# Altium PCB m2_emmc.PcbDoc
Units mil, origin at the board's own origin, x right, y up, seen from the top; angles counter-clockwise.
Board outline 866.14 x 1181.1 mil, 4 copper layers (Top Layer, IN1, IN2, Bottom Layer), stack 31.156 mil thick; 31 components, 15 nets, 275 pads, 49 vias.
Unrouted connection lines stored in the file: 25.
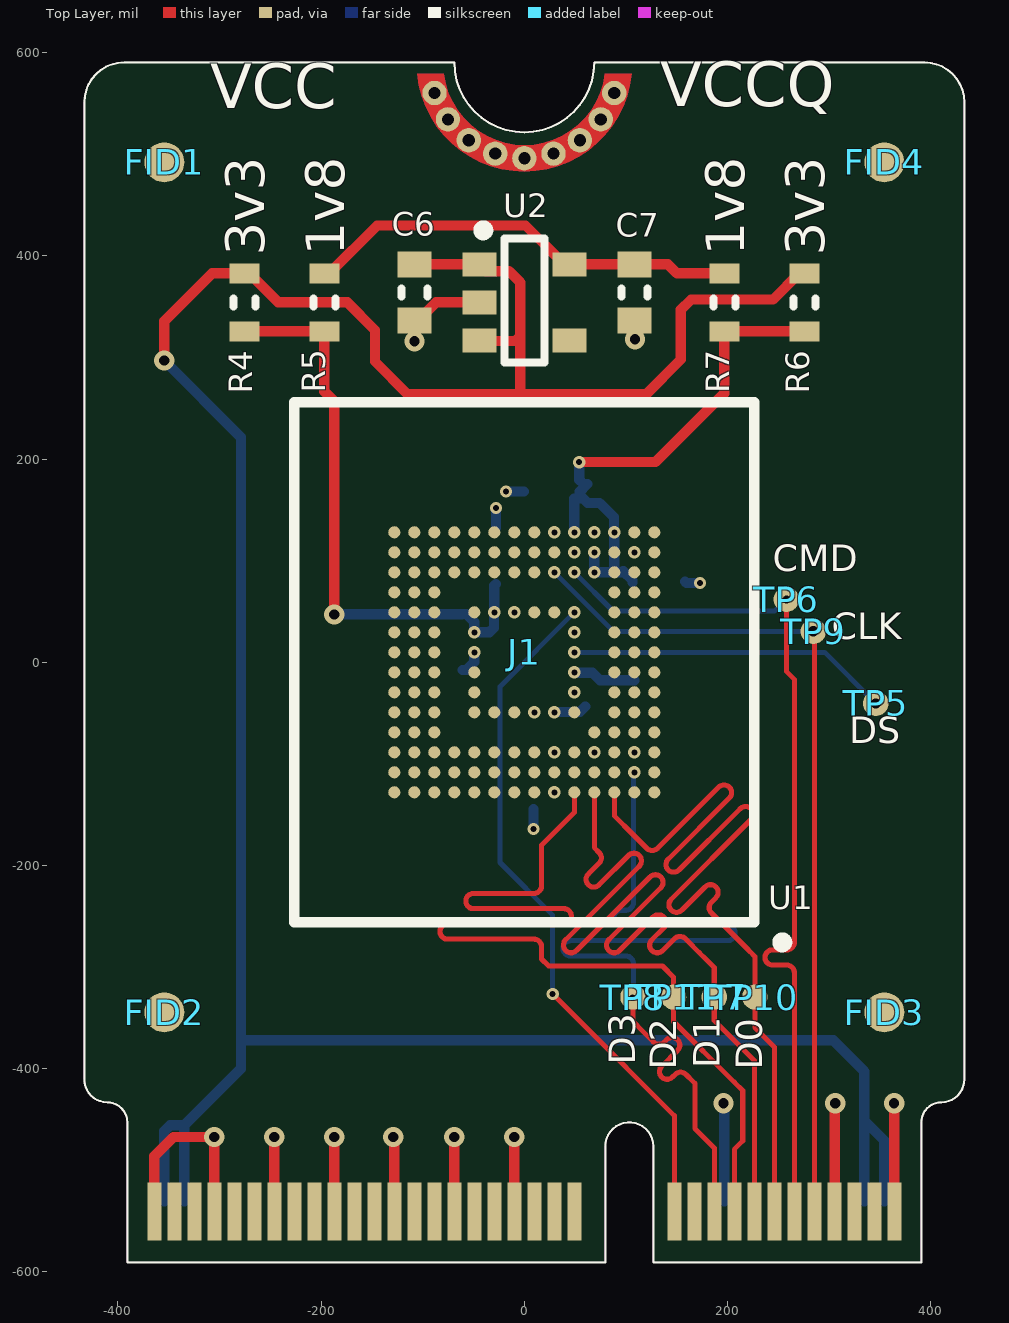
[diagram p0: Top Layer view]
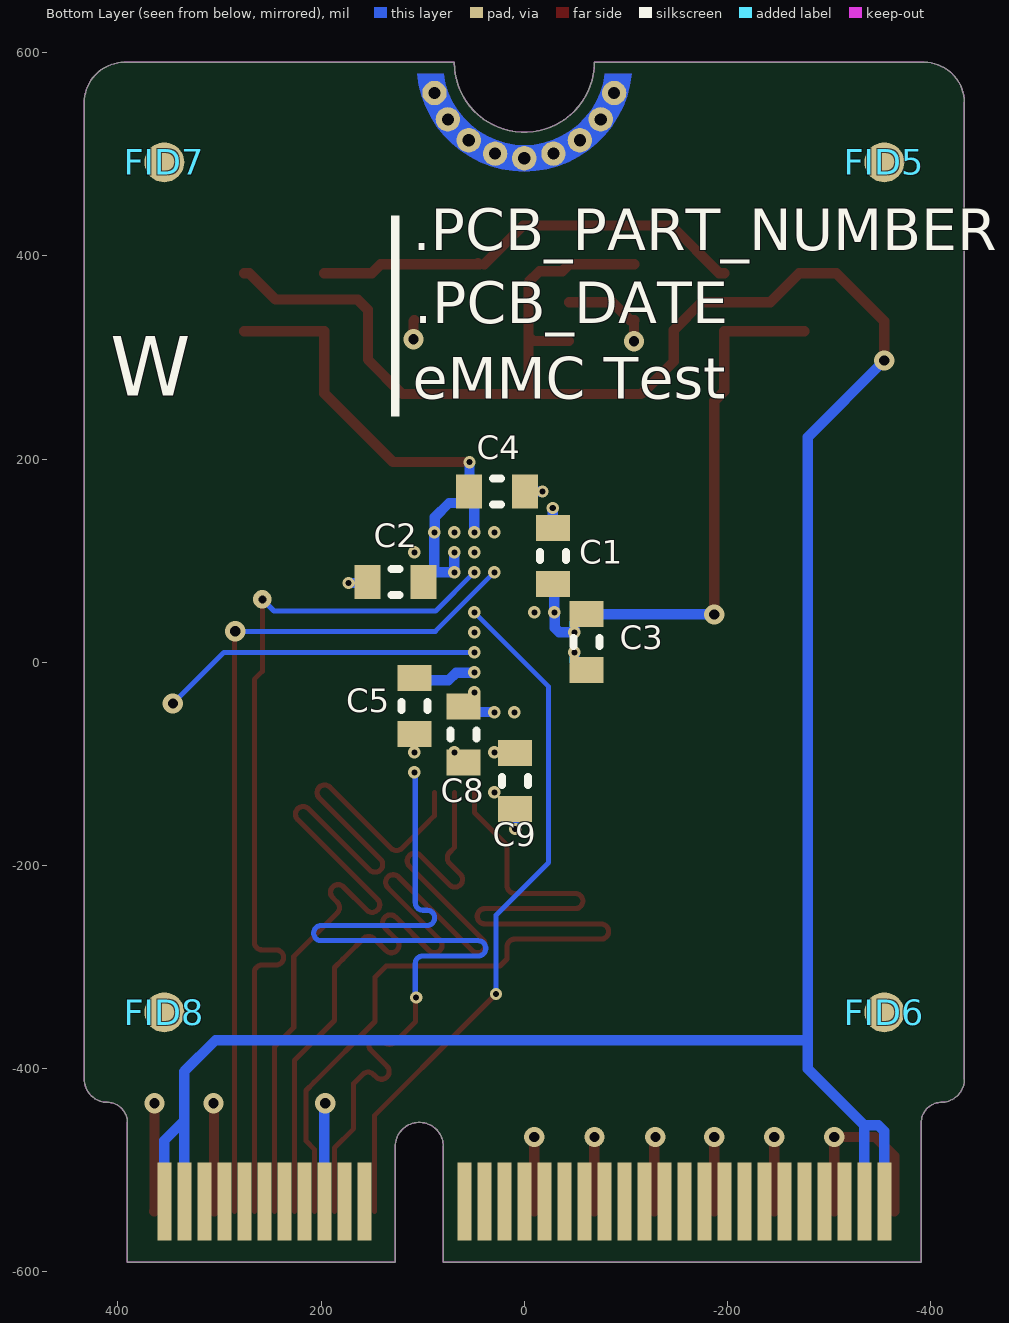
[diagram p1: Bottom Layer view, seen from below]
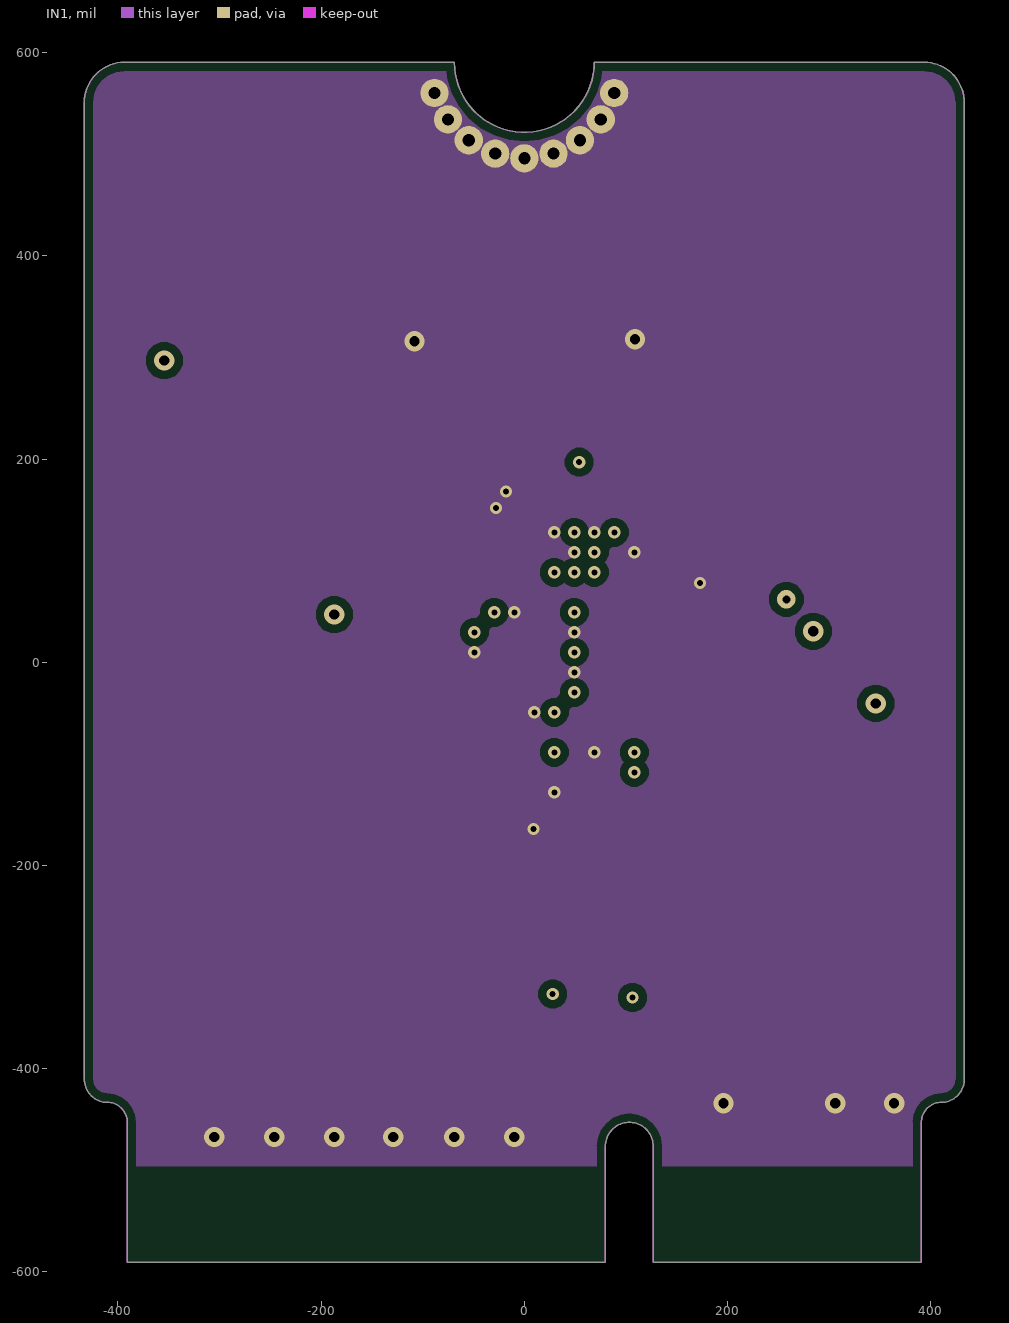
[diagram p2: IN1]
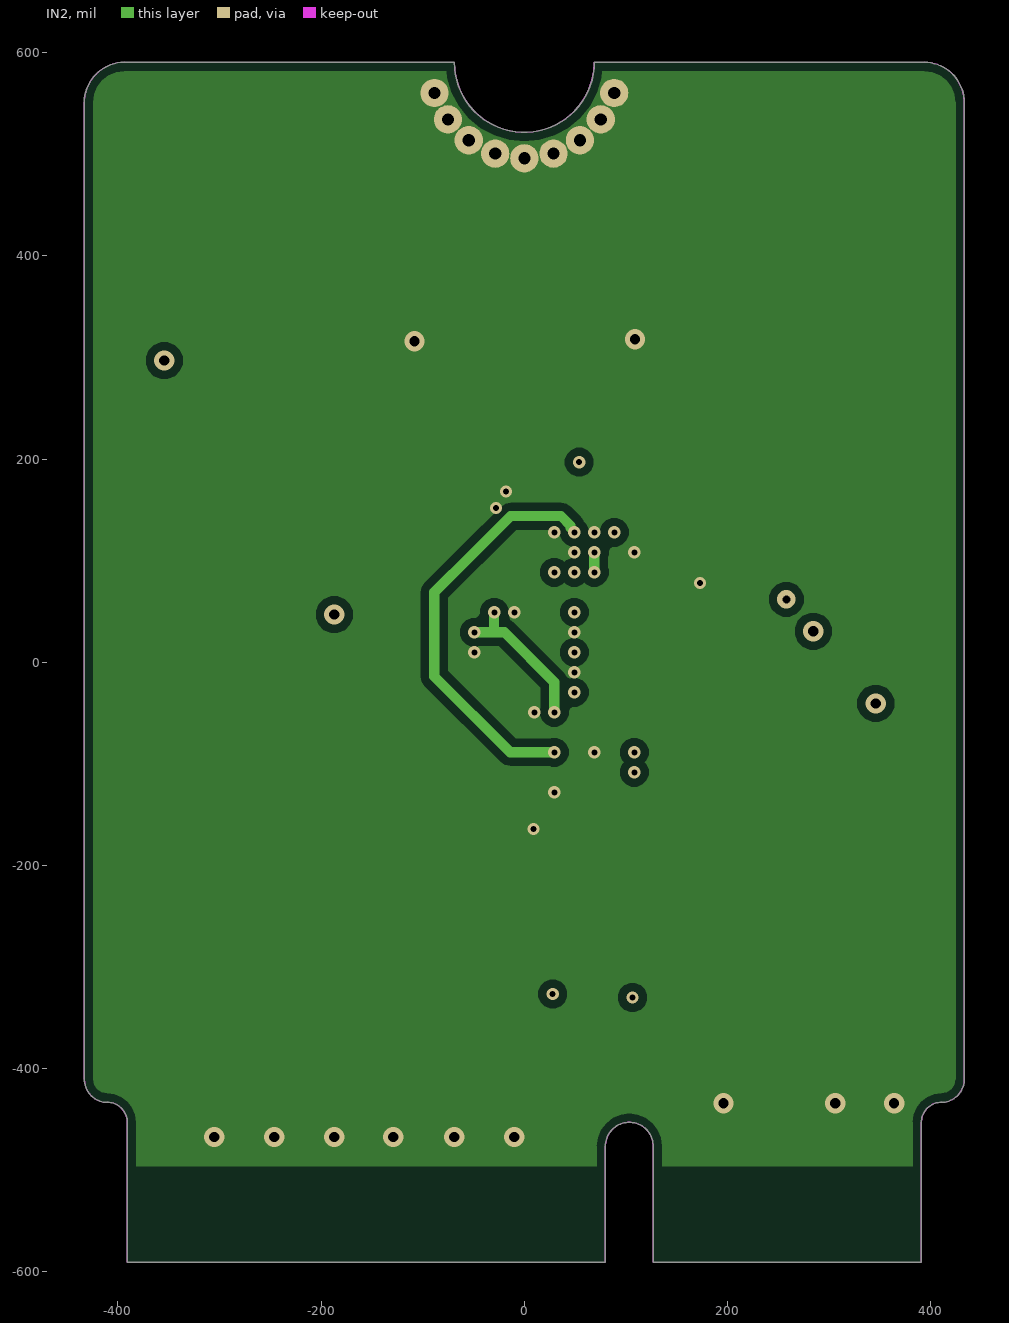
[diagram p3: IN2]
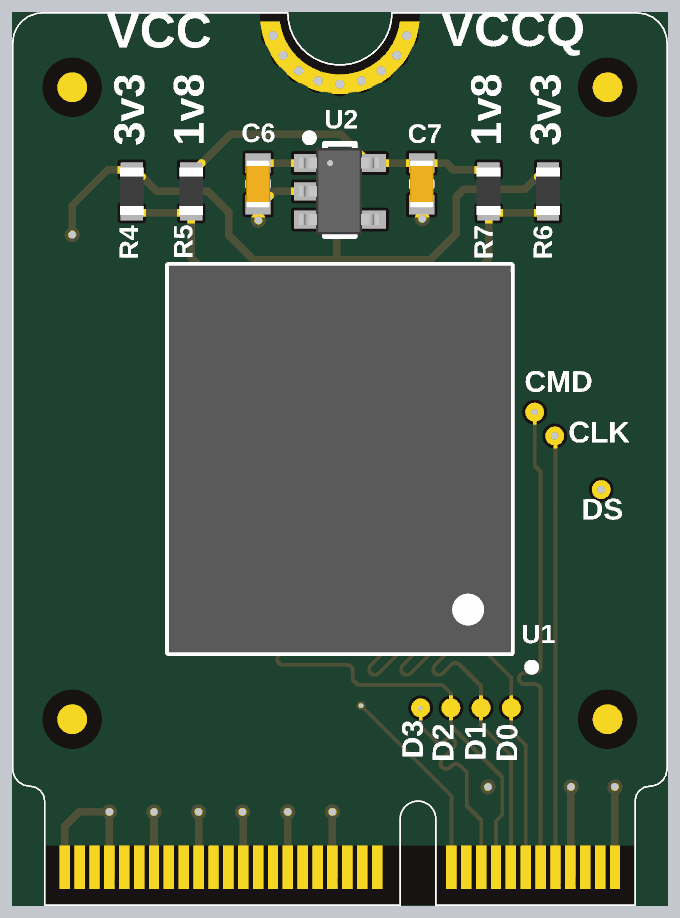
[diagram p4: 3D render of the assembled board from above, using the file's embedded part models]
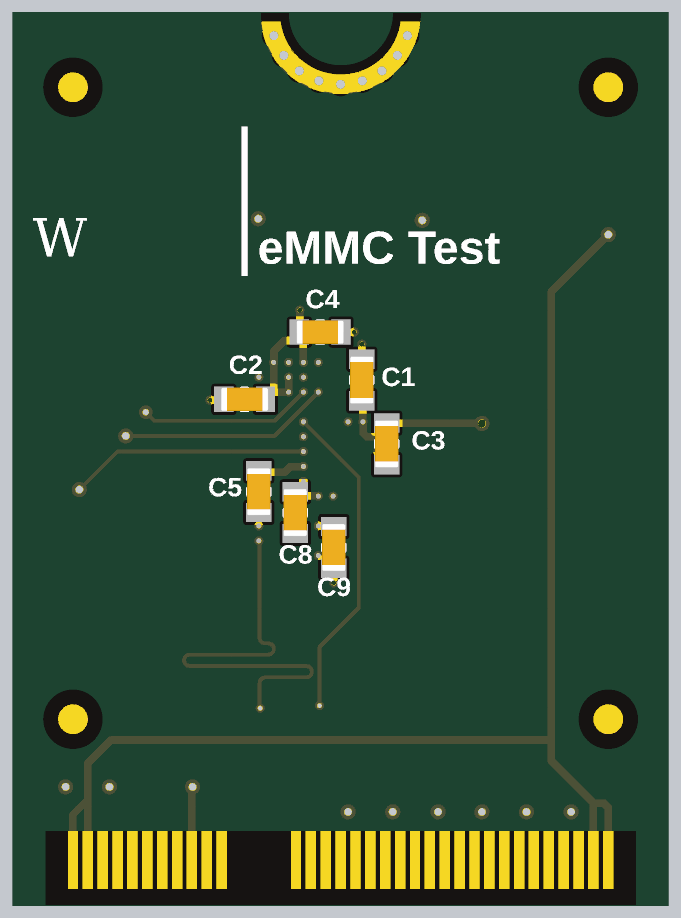
[diagram p5: 3D render of the assembled board from below, using the file's embedded part models]

## Layer stack, top to bottom
Top Solder: solder mask 0.4, Solder Resist, Dk 3.5
Top Layer: signal copper 1.4
Dielectric 1: prepreg 2.8, PP-006, Dk 4.1
IN1: signal copper 1.378
Dielectric1: dielectric 20, FR-4, Dk 4.8
IN2: signal copper 1.378
Dielectric 2: prepreg 2.8, PP-006, Dk 4.1
Bottom Layer: signal copper 1.4
Bottom Solder: solder mask 0.4, Solder Resist, Dk 3.5

## Board outline
-433.07,-410.43 ccw(c-410.43,-410.43) -410.43,-433.07 cw(c-410.43,-452.75) -390.75,-452.75 -390.75,-590.55 79.72,-590.55 79.72,-476.38 cw(c103.35,-476.38) 126.97,-476.38 126.97,-590.55 390.75,-590.55 390.75,-452.75 cw(c410.43,-452.75) 410.43,-433.07 ccw(c410.43,-410.43) 433.07,-410.43 433.07,551.18 ccw(c393.7,551.18) 393.7,590.55 68.9,590.55 cw(c0,590.55) -68.9,590.55 -393.7,590.55 ccw(c-393.7,551.18) -433.07,551.18

## Design rules (kind name [scope] priority, off if disabled: settings)
Clearance [All] p1: gap=5 ignorepadtopadclearanceinfootprint=FALSE except(8: Arc-Poly Track-Poly SMDPad-Poly THPad-Poly Via-Poly Fill-Poly Poly-Poly)
ComponentClearance ComponentClearance_1 [InComponent('J1')] p1: gap=0 collisioncheckmode=3 verticalgap=0 showdistances=FALSE donotcheckwithout3dbody=TRUE
ComponentClearance [All] p2: gap=5 collisioncheckmode=3 verticalgap=5 showdistances=FALSE donotcheckwithout3dbody=TRUE
MatchedLengths [InNetClass('EMMC')] p1: tolerance=50 checknetsindiffpair=FALSE checkdiffpairvsdiffpair=TRUE checkxsignals=TRUE checkothers=TRUE
PolygonConnect [All] p1: connectstyle=Direct reliefconductorwidth=10 reliefentries=4 polygonreliefangle="90 Angle" airgapwidth=10
RoutingVias [All] p1: holewidth=10 width=20 viastyle="Through Hole" minholewidth=6 minwidth=12 maxholewidth=50 maxwidth=75
SilkToSolderMaskClearance SilkscreenOverComponentPads [IsPad] p1: minsilkscreentomaskgap=10 clearancetoexposedcopper=TRUE
SolderMaskExpansion [All] p1: expansion=4 istentingtop=FALSE
Width [All] p1: maxlimit=200 minlimit=5 preferedwidth=5
28 further rules are at their usual default settings.

## Classes and differential pairs
net class EMMC: CLK CMD D0 D1 D2 D3

## Components (designator, comment, footprint, x,y, rotation, side; value= is the part's Value field where it differs from the comment)
C1 "0.1µF" C0603_0.90MM_HD -61,20 r90 bottom
C2 "0.1µF" C0603_0.90MM_HD 127,79 r180 bottom
C3 "2.2µF" C0603_0.90MM_HD -28,104.56 r270 bottom
C4 "2.2µF" C0603_0.90MM_HD 27,168 r0 bottom
C5 "1µF" C0603_0.90MM_HD 108.27,-43.21 r270 bottom
C6 "1µF" C0603_0.90MM_HD -108.27,364.17 r90 top
C7 "1µF" C0603_0.90MM_HD 108.27,364.17 r90 top
C8 "0.1µF" C0603_0.90MM_HD 60,-71 r90 bottom
C9 "0.1µF" C0603_0.90MM_HD 9,-117 r90 bottom
FID1 "fiducial-1mm-2mm" fiducial-1mm-2mm -354.33,492.13 r0 top
FID2 "fiducial-1mm-2mm" fiducial-1mm-2mm -354.33,-344.49 r0 top
FID3 "fiducial-1mm-2mm" fiducial-1mm-2mm 354.33,-344.49 r0 top
FID4 "fiducial-1mm-2mm" fiducial-1mm-2mm 354.33,492.13 r0 top
FID5 "fiducial-1mm-2mm" fiducial-1mm-2mm -354.33,492.13 r180 bottom
FID6 "fiducial-1mm-2mm" fiducial-1mm-2mm -354.33,-344.49 r180 bottom
FID7 "fiducial-1mm-2mm" fiducial-1mm-2mm 354.33,492.13 r180 bottom
FID8 "fiducial-1mm-2mm" fiducial-1mm-2mm 354.33,-344.49 r180 bottom
J1 "M2-2230-E CARD" M2-2230-E 0,-590.55 r0 top locked
R4 "0Ω" R0603_0.55MM_HD -275.59,354.33 r270 top
R5 "0Ω" R0603_0.55MM_HD -196.85,354.33 r270 top
R6 "0Ω" R0603_0.55MM_HD 275.59,354.33 r270 top
R7 "0Ω" R0603_0.55MM_HD 196.85,354.33 r270 top
TP5 "SMT Testpoint 20mil" SMT_TP-25 345.93,-40.45 r0 top
TP6 "SMT Testpoint 20mil" SMT_TP-25 257.87,62.01 r0 top
TP7 "SMT Testpoint 20mil" SMT_TP-25 186.93,-329.45 r0 top
TP8 "SMT Testpoint 20mil" SMT_TP-25 106.93,-329.45 r0 top
TP9 "SMT Testpoint 20mil" SMT_TP-25 284.45,30.51 r0 top
TP10 "SMT Testpoint 20mil" SMT_TP-25 226.93,-329.45 r90 top
TP11 "SMT Testpoint 20mil" SMT_TP-25 146.93,-329.45 r90 top
U1 "THGBMUG6C1LBAIL" BGA153C50P14X14_1150X1300X80 0,0 r180 top locked
U2 "NCP161ASN180T1G" SOT23-5 0,354.33 r0 top

## Footprints (in the part's own frame and the unit in brackets; to place one, negate y for a bottom-side part, rotate by r counter-clockwise, add the part's x,y. Pads: shape width x height; smd on the part's side, far side on the other; paste and mask are expansions set on the pad)
BGA153C50P14X14_1150X1300X80 [mil] "BGA, 153-Leads, Body 11.50x13.00mmx0.80mm, Pitch 0.50mm"
  round 12 smd mask+0: A1(-127.95,127.95) A2(-108.27,127.95) A3(-88.58,127.95) A4(-68.9,127.95) A5(-49.21,127.95) A6(-29.53,127.95) A7(-9.84,127.95) A8(9.84,127.95) A9(29.53,127.95) A10(49.21,127.95) A11(68.9,127.95) A12(88.58,127.95) A13(108.27,127.95) A14(127.95,127.95) B1(-127.95,108.27) B2(-108.27,108.27) B3(-88.58,108.27) B4(-68.9,108.27) B5(-49.21,108.27) B6(-29.53,108.27) B7(-9.84,108.27) B8(9.84,108.27) B9(29.53,108.27) B10(49.21,108.27) B11(68.9,108.27) B12(88.58,108.27) B13(108.27,108.27) B14(127.95,108.27) C1(-127.95,88.58) C2(-108.27,88.58) C3(-88.58,88.58) C4(-68.9,88.58) C5(-49.21,88.58) C6(-29.53,88.58) C7(-9.84,88.58) C8(9.84,88.58) C9(29.53,88.58) C10(49.21,88.58) C11(68.9,88.58) C12(88.58,88.58) C13(108.27,88.58) C14(127.95,88.58) D1(-127.95,68.9) D2(-108.27,68.9) D3(-88.58,68.9) D4(-68.9,68.9) D12(88.58,68.9) D13(108.27,68.9) D14(127.95,68.9) E1(-127.95,49.21) E2(-108.27,49.21) E3(-88.58,49.21) E5(-49.21,49.21) E6(-29.53,49.21) E7(-9.84,49.21) E8(9.84,49.21) E9(29.53,49.21) E10(49.21,49.21) E12(88.58,49.21) E13(108.27,49.21) E14(127.95,49.21) F1(-127.95,29.53) F2(-108.27,29.53) F3(-88.58,29.53) F5(-49.21,29.53) F10(49.21,29.53) F12(88.58,29.53) F13(108.27,29.53) F14(127.95,29.53) G1(-127.95,9.84) G2(-108.27,9.84) G3(-88.58,9.84) G5(-49.21,9.84) G10(49.21,9.84) G12(88.58,9.84) G13(108.27,9.84) G14(127.95,9.84) H1(-127.95,-9.84) H2(-108.27,-9.84) H3(-88.58,-9.84) H5(-49.21,-9.84) H10(49.21,-9.84) H12(88.58,-9.84) H13(108.27,-9.84) H14(127.95,-9.84) J1(-127.95,-29.53) J2(-108.27,-29.53) J3(-88.58,-29.53) J5(-49.21,-29.53) J10(49.21,-29.53) J12(88.58,-29.53) J13(108.27,-29.53) J14(127.95,-29.53) K1(-127.95,-49.21) K2(-108.27,-49.21) K3(-88.58,-49.21) K5(-49.21,-49.21) K6(-29.53,-49.21) K7(-9.84,-49.21) K8(9.84,-49.21) K9(29.53,-49.21) K10(49.21,-49.21) K12(88.58,-49.21) K13(108.27,-49.21) K14(127.95,-49.21) L1(-127.95,-68.9) L2(-108.27,-68.9) L3(-88.58,-68.9) L12(88.58,-68.9) L13(108.27,-68.9) L14(127.95,-68.9) M1(-127.95,-88.58) M2(-108.27,-88.58) M3(-88.58,-88.58) M4(-68.9,-88.58) M5(-49.21,-88.58) M6(-29.53,-88.58) M7(-9.84,-88.58) M8(9.84,-88.58) M9(29.53,-88.58) M10(49.21,-88.58) M11(68.9,-88.58) M12(88.58,-88.58) M13(108.27,-88.58) M14(127.95,-88.58) N1(-127.95,-108.27) N2(-108.27,-108.27) N3(-88.58,-108.27) N4(-68.9,-108.27) N5(-49.21,-108.27) N6(-29.53,-108.27) N7(-9.84,-108.27) N8(9.84,-108.27) N9(29.53,-108.27) N10(49.21,-108.27) N11(68.9,-108.27) N12(88.58,-108.27) N13(108.27,-108.27) N14(127.95,-108.27) P1(-127.95,-127.95) P2(-108.27,-127.95) P3(-88.58,-127.95) P4(-68.9,-127.95) P5(-49.21,-127.95) P6(-29.53,-127.95) P7(-9.84,-127.95) P8(9.84,-127.95) P9(29.53,-127.95) P10(49.21,-127.95) P11(68.9,-127.95) P12(88.58,-127.95) P13(108.27,-127.95) P14(127.95,-127.95)
  silkscreen extent -259,-256 226,281, body extent -226,-256 226,256, height 31
C0603_0.90MM_HD [mm] "Chip Capacitor, 2-Leads, Body 1.60x0.80mm, IPC High Density"
  rect 0.65x0.85 smd: 1(-0.7,0) 2(0.7,0)
  silkscreen extent -0.1,-0.33 0.1,0.33, body extent -0.8,-0.4 0.8,0.4, height 0.9
fiducial-1mm-2mm [mm] "1mm Pad 2mm Opening"
  round 1 smd paste-2539.97 mask+0.5: 1(0,0)
M2-2230-E [mm]
  rect 0.35x1.45 smd paste-2539.97 mask+0: 1(9.25,1.275) 3(8.75,1.275) 5(8.25,1.275) 7(7.75,1.275) 9(7.25,1.275) 11(6.75,1.275) 13(6.25,1.275) 15(5.75,1.275) 17(5.25,1.275) 19(4.75,1.275) 21(4.25,1.275) 23(3.75,1.275) 33(1.25,1.275) 35(0.75,1.275) 37(0.25,1.275) 39(-0.25,1.275) 41(-0.75,1.275) 43(-1.25,1.275) 45(-1.75,1.275) 47(-2.25,1.275) 49(-2.75,1.275) 51(-3.25,1.275) 53(-3.75,1.275) 55(-4.25,1.275) 57(-4.75,1.275) 59(-5.25,1.275) 61(-5.75,1.275) 63(-6.25,1.275) 65(-6.75,1.275) 67(-7.25,1.275) 69(-7.75,1.275) 71(-8.25,1.275) 73(-8.75,1.275) 75(-9.25,1.275)
  rect 0.35x1.95 smd far side paste-2539.97 mask+0: 2(9,1.525) 4(8.5,1.525) 6(8,1.525) 8(7.5,1.525) 10(7,1.525) 12(6.5,1.525) 14(6,1.525) 16(5.5,1.525) 18(5,1.525) 20(4.5,1.525) 22(4,1.525) 32(1.5,1.525) 34(1,1.525) 36(0.5,1.525) 38(0,1.525) 40(-0.5,1.525) 42(-1,1.525) 44(-1.5,1.525) 46(-2,1.525) 48(-2.5,1.525) 50(-3,1.525) 52(-3.5,1.525) 54(-4,1.525) 56(-4.5,1.525) 58(-5,1.525) 60(-5.5,1.525) 62(-6,1.525) 64(-6.5,1.525) 66(-7,1.525) 68(-7.5,1.525) 70(-8,1.525) 72(-8.5,1.525) 74(-9,1.525)
  round 0.61 / inner round 0.708 / far side round 0.61 hole 0.305: SCREW(-2.245,29.233) SCREW(-1.909,28.573) SCREW(-1.389,28.051) SCREW(-0.728,27.717) SCREW(0.001,27.6) SCREW(0.73,27.717) SCREW(1.39,28.051) SCREW(1.911,28.573) SCREW(2.246,29.233)
  Top Layer region: -2.68,29.708 -2.242,28.472 -1.271,27.589 0.001,27.27 1.273,27.589 2.243,28.472 2.681,29.708 2.681,29.708 2.017,29.708 1.67,28.803 0.942,28.162 0.001,27.93 -0.941,28.162 -1.668,28.803 -2.015,29.708 -2.015,29.708
  Bottom Layer region: -2.68,29.708 -2.242,28.472 -1.271,27.589 0.001,27.27 1.273,27.589 2.243,28.472 2.681,29.708 2.681,29.708 2.017,29.708 1.67,28.803 0.942,28.162 0.001,27.93 -0.941,28.162 -1.668,28.803 -2.015,29.708 -2.015,29.708
  silkscreen extent -11,0 11,30
R0603_0.55MM_HD [mm] "Resistor 0603 High Density"
  rect 0.5x0.75 smd: 1(-0.725,0) 2(0.725,0)
  silkscreen extent -0.1,-0.28 0.1,0.28, body extent -0.8,-0.4 0.8,0.4, height 0.55
SMT_TP-25 [mil] ".025\" SMT Test pad"
  round 25 smd paste-25: 1(0,0)
SOT23-5 [mm] "SOT23, 5-Leads, Body 3.1x2.6mm (max), Pitch 0.95mm, IPC High Density"
  rect 0.85x0.6 smd: 1(-1.125,0.95) 2(-1.125,0) 3(-1.125,-0.95) 4(1.125,-0.95) 5(1.125,0.95)
  silkscreen extent -1.15,-1.5 0.5,1.92, body extent -1.38,-1.45 1.32,1.45, height 1.15

## Part data
C1 C2 C8 C9: library part GCJ188R71C104KA01D, "CAP CER 0.1UF 16V X7R 0603", Internal Part Number=nan, Manufacturer="Murata Electronics", Operating Temperature="-55°C ~ 125°C", Package=603, Ratings=AEC-Q200, Temperature Coefficient=X7R, Tolerance=±10%, Voltage - Rated=16V, Category=Capacitors, Flags=nan, JLCPCB Part #=nan, kicad-footprint=C0603_0.90MM_MD:C0603_0.90MM_MD, kicad-symbol=Capacitor:C_2P_NP, Manufacturer Part Number=GCJ188R71C104KA01D, Substitution Notes="0.1µF , 16V , ±10% , X7R , -55°C ~ 125°C , AEC-Q200 , 0603", Thickness (Max)=0.90MM
C3 C4: library part GCM188R70J225KE22D, "CAP CER 2.2UF 6.3V X7R 0603", Internal Part Number=nan, Manufacturer="Murata Electronics", Operating Temperature="-55°C ~ 125°C", Package=603, Ratings=AEC-Q200, Temperature Coefficient=X7R, Tolerance=±10%, Voltage - Rated=6.3V, Category=Capacitors, Flags=nan, JLCPCB Part #=nan, kicad-footprint=C0603_0.90MM_MD:C0603_0.90MM_MD, kicad-symbol=Capacitor:C_2P_NP, Manufacturer Part Number=GCM188R70J225KE22D, Substitution Notes="2.2µF , 6.3V , ±10% , X7R , -55°C ~ 125°C , AEC-Q200 , 0603", Thickness (Max)=0.90MM
C5 C6 C7: library part GCM188R71C105KA64J, "CAP CER 1UF 16V X7R 0603", Internal Part Number=nan, JLCPCB Part #=C2169902, Manufacturer="Murata Electronics", Operating Temperature="-55°C ~ 125°C", Package=603, Ratings=AEC-Q200, Temperature Coefficient=X7R, Tolerance=±10%, Voltage - Rated=16V, Category=Capacitors, Flags=nan, kicad-footprint=C0603_0.90MM_MD:C0603_0.90MM_MD, kicad-symbol=Capacitor:C_2P_NP, Manufacturer Part Number=GCM188R71C105KA64J, Substitution Notes="1µF , 16V , ±10% , X7R , -55°C ~ 125°C , AEC-Q200 , 0603", Thickness (Max)=0.90MM
FID1 FID2 FID3 FID4 FID5 FID6 FID7 FID8: Manufacturer=Wavenumber, Flags=no-bom, Id=4144, is_external=0, Manufacturer Part Number=fiducial-1mm-2mm
J1: "M.2 2230 E Key Card Template", Manufacturer=Wavenumber, cad-reference="M2-2230-E CARD", Flags=NO_BOM, kicad-footprint=M2-2230-E:M2-2230-E, kicad-symbol=M2_CARD__E:M2_CARD__E, Manufacturer Part Number="M2-2230-E CARD"
R4 R5 R6 R7: library part ERJ-3GEY0R00V, "RES 0.0 OHM 1/10W JUMP 0603 SMD", Internal Part Number=nan, JLCPCB Part #=C122704, Limiting Element Voltage=75, Manufacturer="Panasonic Electronic Components", Maximum Overload Voltage=150, Maximum Working Voltage=0.0V, Package="0603 (1608 Metric)", Package Power="0603  (0.1W)", Power (Watts)="0.1W- 1/10W", Ratings=AEC-Q200, Resistance (Ohms)=0, Sort Value Package=603_0, Supplier Package=603, Supplier Part Number 1=P0.0GCT-ND, Temperature Coefficient=-, Tolerance=Jumper, Category=Resistors, Composition="Thick Film", Features=-, Flags=nan, Height=0.55MM, kicad-footprint=R0603_0.55MM_HD:R0603_0.55MM_HD, kicad-symbol=Resistor:R_2P, Manufacturer 1="Panasonic Electronic Components", Manufacturer Part Number=ERJ-3GEY0R00V, Manufacturer Part Number 1=ERJ-3GEY0R00V, Number of Terminations=2, Sort Value=0, Substitution Notes="0 , Jumper , 0603 , AEC-Q200", Supplier 1=Digi-Key
TP5 TP6 TP7 TP8 TP9 TP10 TP11: library part SMT_TP-25, Manufacturer=Wavenumber, Flags=no-bom, Id=4137, is_external=0, Manufacturer Part Number=SMT_TP-25
U1: "eMMC 8GB v5.1 eMMC", JLCPCB Part #=C7509349, Manufacturer="Kioxia America", Package / Case=153WFBGA, Category="Integrated Circuits (ICs)", Created By=JSA, Manufacturer Part Number=THGBMUG6C1LBAIL, TEPN=150-00128
U2: "IC REG LINEAR 1.8V 450MA SOT23-5", JLCPCB Part #=C22435172, Manufacturer=onsemi, Manufacturer Part Number=NCP161ASN180T1G

## Via types
v1: diameter 12, hole 6, Top Layer to Bottom Layer, tented both sides, 33 vias
v2: diameter 20, hole 10, Top Layer to Bottom Layer, tented both sides, 15 vias
v3: diameter 18, hole 8, Top Layer to Bottom Layer, tented both sides, 1 vias

## Nets (pads, with @x,y where several pads share a name; then routed paths per layer and width w, separated by ;. In a path a pad name is that pad's centre, name@x,y a point inside that pad or via, vN(x,y) a via of type N, cw(c..) or ccw(c..) an arc to the next point about the centre after c; other vN are vias at no path point)
+1v8: C7.2 R5.1 R7.1 U2.5 | length 428.3
  Top Layer w10: R5.1 -191.93,382.87 -144.8,430 1.1,430 U2.5@39.37,391.73 ; U2.5 U2.5@45.56,393 ; U2.5@45.56,391.73 C7.2 141.27,391.73 150.13,382.87 R7.1
+3v3: C6.2 J1.2 J1.4 J1.72 J1.74 R4.1 R6.1 U2.1 U2.3 | length 2912.7
  Top Layer w10: v2(-354.33,297) -354.33,335.67 -307.13,382.87 R4.1 -270.67,382.87 -242.13,354.33 -174.33,354.33 -147,327 -147,296 -115,264 -7,264 ; C6.2 U2.1 -37.48,384.92 -14.92,384.92 -4,374 -4,320.79 ; U2.3@-43.76,316.39 -8.39,316.39 -4,320.79 ; R6.1 270.67,382.87 244.8,357 164,357 154,347 154,298 120,264 -7,264 ; -7,264 -4,267 -4,320.79
  Bottom Layer w10: J1.74 -354.33,-461.51 -348.47,-455.65 -334.65,-455.65 ; v2(-354.33,297) -279,221.67 -279,-372 ; J1.72 -334.65,-455.65 ; J1.4 334.65,-450.94 ; J1.2 354.33,-470.62 334.65,-450.94 ; -334.65,-455.65 -279,-400 -279,-372 ; -279,-372 304,-372 334.65,-402.65 334.65,-450.94
CLK: J1.9 TP9.1 U1.M6 | length 850.2
  Top Layer w5: v2(284.45,30.51) 285.43,29.53 J1.9
  Bottom Layer w5: v1(29.53,88.58) 87.6,30.51 v2(284.45,30.51)
CMD: J1.11 TP6.1 U1.M5 | length 879.5
  Top Layer w5: v3(257.87,62.01) 257.87,-8.87 265.75,-16.75 265.75,-75 265.75,-136 265.75,-239 265.75,-275.5 cw(c258.25,-275.5) 258.25,-283 244.43,-283 ccw(c244.43,-290.5) 244.43,-298 258.25,-298 cw(c258.25,-305.5) 265.75,-305.5 265.75,-308 J1.11
  Bottom Layer w5: v1(49.21,88.58) 87.24,50.55 246.42,50.55 v3(257.87,62.01)
D0: J1.13 TP10.1 U1.A3 | length 933.9
  Top Layer w5: U1.A3 88.58,-142.42 88.58,-151.1 98.85,-161.37 100.53,-163.05 118.74,-181.26 120.51,-183.03 ccw(c125.81,-177.72) 131.11,-183.03 191.22,-122.92 cw(c196.52,-128.23) 201.83,-122.92 cw(c196.52,-128.23) 201.83,-133.53 141.59,-193.77 ccw(c146.89,-199.07) 141.59,-204.37 ccw(c146.89,-199.07) 152.2,-204.37 212.43,-144.14 cw(c217.74,-149.44) 223.04,-144.14 cw(c217.74,-149.44) 223.04,-154.74 144.51,-233.28 ccw(c149.81,-238.58) 144.51,-243.88 ccw(c149.81,-238.58) 155.11,-243.88 177.94,-221.05 cw(c183.25,-226.36) 188.55,-221.05 cw(c183.25,-226.36) 188.55,-231.66 184.15,-236.06 ccw(c189.45,-241.36) 184.15,-246.67 220.07,-282.59 221.83,-284.35 226.93,-289.45 TP10.1 226.93,-359.45 246.06,-378.58 J1.13
D1: J1.15 TP7.1 U1.A4 | length 958.9
  Top Layer w5: U1.A4 68.9,-143.1 68.9,-182.42 73.62,-187.14 cw(c68.32,-192.44) 73.62,-197.75 62.97,-208.39 ccw(c68.27,-213.7) 62.97,-219 ccw(c68.27,-213.7) 73.58,-219 102.48,-190.1 cw(c107.78,-195.4) 113.09,-190.1 cw(c107.78,-195.4) 113.09,-200.7 40.7,-273.09 ccw(c46,-278.39) 40.7,-283.7 ccw(c46,-278.39) 51.31,-283.7 123.74,-211.27 cw(c129.04,-216.57) 134.34,-211.27 cw(c129.04,-216.57) 134.34,-221.88 83.13,-273.09 ccw(c88.43,-278.39) 83.13,-283.7 ccw(c88.43,-278.39) 93.73,-283.7 126.65,-250.78 cw(c131.96,-256.08) 137.26,-250.78 cw(c131.96,-256.08) 137.26,-261.38 125.55,-273.09 ccw(c130.86,-278.39) 125.55,-283.7 ccw(c130.86,-278.39) 136.16,-283.7 147.87,-271.99 cw(c153.17,-277.29) 158.47,-271.99 160.24,-273.76 160.74,-274.26 172.24,-285.76 178.74,-292.26 186.93,-300.45 TP7.1 186.93,-352.45 218.24,-383.76 226.38,-391.9 J1.15
D2: J1.17 TP11.1 U1.A5 | length 958.9
  Top Layer w5: U1.A5 49.21,-147.79 17,-180 17,-181.5 17,-219.95 cw(c9.5,-219.95) 9.5,-227.45 -50.11,-227.45 ccw(c-50.11,-234.95) -50.11,-242.45 38.84,-242.45 cw(c38.84,-249.95) 38.84,-257.45 -75.5,-257.45 ccw(c-75.5,-264.95) -75.5,-272.45 9.5,-272.45 cw(c9.5,-279.95) 17,-279.95 17,-282.45 17,-292 24,-299 74.35,-299 136,-299 146.93,-309.93 146.93,-330.07 146.93,-353.45 206.74,-413.26 215,-421.52 215,-471 206.69,-479.31 J1.17
D3: J1.19 TP8.1 U1.B2 | length 874.4
  Top Layer w5: TP8.1 v1(106.44,-329.94) 106.93,-330.43 106.93,-353.45 116.48,-363 125.48,-372 127.25,-373.77 ccw(c132.55,-368.46) 137.86,-373.77 140.18,-371.45 cw(c145.48,-376.75) 150.78,-371.45 cw(c145.48,-376.75) 150.78,-382.05 135.21,-397.63 ccw(c140.51,-402.93) 135.21,-408.23 ccw(c140.51,-402.93) 145.82,-408.23 148.46,-405.59 cw(c153.76,-410.89) 159.07,-405.59 166.23,-412.75 168,-414.52 168,-436.76 168,-459 187.01,-478.01 J1.19
  Bottom Layer w5: v1(106.44,-329.94) 107.35,-329.03 107.35,-299 107.35,-296.5 ccw(c99.85,-296.5) 99.85,-289 45.43,-289 cw(c45.43,-281.5) 45.43,-274 199.85,-274 ccw(c199.85,-266.5) 199.85,-259 95.7,-259 cw(c95.7,-251.5) 95.7,-244 99.85,-244 ccw(c99.85,-236.5) 107.35,-236.5 107.35,-169.87 107.35,-156.24 107.35,-109.18 v1(108.27,-108.27) v1@107.28,-109.25
GND: C1.1 C2.1 C3.1 C4.1 C5.1 C6.1 C7.1 C8.1 C9.1 J1.1 J1.7 J1.18 J1.39 J1.45 J1.51 J1.57 J1.63 J1.69 J1.75 J1.SCREW U1.A6 U1.C4 U1.E7 U1.G5 U1.H10 U1.J5 U1.K8 U1.N2 U1.N5 U1.P4 U1.P6 U2.2 | length 1154.9
  Top Layer w10: J1.75 -364.17,-486.17 -345.12,-467.12 v2(-305.12,-467.12) J1.69 ; J1.63 v2@-246.06,-465.06 ; J1.57 v2@-187.01,-466.01 ; v2@-129,-463 -127.95,-464.05 J1.51 ; v2(-108,316) -108,336.35 C6.1 -104.33,336.61 -86.61,354.33 U2.2 ; v2@-69,-465 -68.9,-465.1 J1.45 ; J1.39 v2@-9.84,-464.84 ; C7.1 109,335.88 v2(109,318) ; J1.7 305.56,-539.91 305.56,-433.44 v2@306,-433 ; v2(364,-434) 364.09,-434.09 364.09,-540.27 J1.1
  Bottom Layer w10: C1.1 -57.06,-7.56 -49.27,0.24 v1(-49.21,9.84) v1(-49.21,9.84) v1@-49.6,9.46 ; C3.1 v1(-28,152) ; v1(-18,168) C4.1 ; v1(9,-164) C9.1 ; v1(49.21,-9.84) 49.6,-10.23 67.08,-10.23 74.57,-17.72 C5.1@108.27,-17.72 ; v1(108.27,108.27) v1@108.27,108.81 ; C2.1@158.07,79.43 159.5,78 v1(173,78) ; v2(196,-434) 196.85,-434.85 J1.18
  other v1: 29.53,-127.95 68.9,-88.58 9.84,-49.21 49.21,29.53 -9.84,49.21 49.21,108.27 29.53,127.95 68.9,127.95
  other v2: -246.06,-467.12 -187.01,-467.12 -129,-467.12 -69,-467.12 -9.84,-467.12 306,-434
NetC5_2: C5.2 U1.C2 | length 0
  other v1: 108.27,-88.58
NetTP5_1: TP5.1 U1.H5 | length 317.5
  Bottom Layer w5: v1(49.21,9.84) 295.64,9.84 v2(345.93,-40.45)
RST: J1.23 U1.K5 | length 691
  Top Layer w5: v1(27.93,-326.45) 54.48,-353 147.64,-446.16 J1.23
  Bottom Layer w5: v1(27.93,-326.45) 27.93,-248.93 -24,-197 -24,-24 v1(49.21,49.21)
VCC: C1.2 C3.2 C8.2 R4.2 R5.2 U1.E6 U1.F5 U1.J10 U1.K9 | length 760.9
  Top Layer w10: R4.2 R5.2 -196.85,266.85 -187,257 v2(-187,47)
  IN2 w10: v1(-49.21,29.53) -32.14,29.53 ; v1(-29.53,49.21) -29.91,48.83 -29.91,31.76 -32.14,29.53 ; v1(29.53,-49.21) 29.53,-19.53 -19.53,29.53 -32.14,29.53
  Bottom Layer w10: v2(-187,47) -186.72,47.28 -61.28,47.28 C1.2 -57.06,47.56 -49.27,39.76 -49.27,29.58 v1(-49.21,29.53) ; v1@-49.6,29.91 v1(-49.21,29.53) ; C3.2 -29.53,75.47 v1(-29.53,49.21) -29.91,48.83 -29.91,33.99 -34.37,29.53 v1(-49.21,29.53) ; v1(29.53,-49.21) 29.91,-48.83 54.61,-48.83 C8.2
  other v1: 49.21,-29.53
VCCQ: C2.2 C4.2 C9.2 R6.2 R7.2 U1.C6 U1.M4 U1.N4 U1.P3 U1.P5 | length 982.1
  Top Layer w10: v1(54,197) 129,197 196.85,264.85 R7.2 R6.2
  IN2 w10: v1(29.53,-88.58) -14,-88.58 -88.58,-14 -88.58,68.9 -51.06,106.43 -50.95,106.43 -13.42,143.95 36.15,143.95 45.53,134.58 45.53,132.18 49.21,128.49 v1(49.21,127.95) ; v1(68.9,88.58) v1(68.9,108.27)
  Bottom Layer w10: v1(49.21,127.95) 49.21,161.33 C4.2@54.56,161.33 ; v1(54,197) 54,179.73 58.29,175.44 62,175.44 C4.2 ; C4.2@54.56,164.06 C4.2 ; v1(68.9,108.27) v1(68.9,88.58) C2.2@88.58,88.58 ; C2.2@96.4,88.58 C2.2@88.58,88.58 ; C2.2@97.39,89.57 106.43,80.52 C2.2@106.43,78.55 ; C4.2 54.56,164.65 62.35,156.85 74.15,156.85 88.2,142.8 88.2,128.34 v1(88.58,127.95) C2.2@88.58,88.58
WK: J1.21
pads on no net: FID1.1 FID2.1 FID3.1 FID4.1 FID5.1 FID6.1 FID7.1 FID8.1 J1.3 J1.5 J1.6 J1.8 J1.10 J1.12 J1.14 J1.16 J1.20 J1.22 J1.32 J1.33 J1.34 J1.35 J1.36 J1.37 J1.38 J1.40 J1.41 J1.42 J1.43 J1.44 J1.46 J1.47 J1.48 J1.49 J1.50 J1.52 J1.53 J1.54 J1.55 J1.56 J1.58 J1.59 J1.60 J1.61 J1.62 J1.64 J1.65 J1.66 J1.67 J1.68 J1.70 J1.71 J1.73 U1.A1 U1.A2 U1.A7 U1.A8 U1.A9 U1.A10 U1.A11 U1.A12 U1.A13 U1.A14 U1.B1 U1.B3 U1.B4 U1.B5 U1.B6 U1.B7 U1.B8 U1.B9 U1.B10 U1.B11 U1.B12 U1.B13 U1.B14 U1.C1 U1.C3 U1.C5 U1.C7 U1.C8 U1.C9 U1.C10 U1.C11 U1.C12 U1.C13 U1.C14 U1.D1 U1.D2 U1.D3 U1.D4 U1.D12 U1.D13 U1.D14 U1.E1 U1.E2 U1.E3 U1.E5 U1.E8 U1.E9 U1.E10 U1.E12 U1.E13 U1.E14 U1.F1 U1.F2 U1.F3 U1.F10 U1.F12 U1.F13 U1.F14 U1.G1 U1.G2 U1.G3 U1.G10 U1.G12 U1.G13 U1.G14 U1.H1 U1.H2 U1.H3 U1.H12 U1.H13 U1.H14 U1.J1 U1.J2 U1.J3 U1.J12 U1.J13 U1.J14 U1.K1 U1.K2 U1.K3 U1.K6 U1.K7 U1.K10 U1.K12 U1.K13 U1.K14 U1.L1 U1.L2 U1.L3 U1.L12 U1.L13 U1.L14 U1.M1 U1.M2 U1.M3 U1.M7 U1.M8 U1.M9 U1.M10 U1.M11 U1.M12 U1.M13 U1.M14 U1.N1 U1.N3 U1.N6 U1.N7 U1.N8 U1.N9 U1.N10 U1.N11 U1.N12 U1.N13 U1.N14 U1.P1 U1.P2 U1.P7 U1.P8 U1.P9 U1.P10 U1.P11 U1.P12 U1.P13 U1.P14 U2.4

## Polygon pours and split planes (outlines as drawn)
GND on IN2 "NONET_L-01_P-001" (solid, remove dead copper, pour order 2): -566,-496 615,-496 615,797 -567,797 -567,-497
GND on IN1 "NONET_L-01_P-001" (solid, remove dead copper, pour order 0): -554,683 -554,-496 562,-496 562,683

## Keep-outs
Keep-Out Layer:
  the board outline again, w1

## Silkscreen, mask and mechanical layers (free items; w line width, h text height)
Top Overlay:
  text "VCCQ" at 133.55,533 h75
  text "VCC" at -309.09,531.01 h75
  text "3v3" at -243.09,400.1 h65 r90
  text "1v8" at -164.35,400.1 h65 r90
  text "1v8" at 229.35,400.1 h65 r90
  text "3v3" at 308.09,400.1 h65 r90
  text "CMD" at 244.35,80.62 h45
  text "CLK" at 302.36,13.62 h45
  text "DS" at 320.02,-88.37 h45
  text "D3" at 118.2,-396.21 h45 r90
  text "D1" at 201.37,-399.4 h45 r90
  text "D2" at 158.45,-400.92 h45 r90
  text "D0" at 243.12,-400.96 h45 r90
Bottom Overlay:
  rectangle: 123,242 131,440
  text ".PCB_PART_NUMBER" at 109.77,391.89 h70
  text ".PCB_DATE" at 108.32,319.89 h70
  text ".PCB_MIXDOWN" at -250.7,254.94 h250
  text "eMMC Test" at 109.9,245.6 h70
  text "W" at 407.45,242.99 h100
[8] Board Outline:
  lines w2: 68.9,590.55 cw(c0,590.55) -68.9,590.55 -393.7,590.55 ccw(c-393.7,551.18) -433.07,551.18 -433.07,236.22 -433.07,-410.43 ccw(c-410.43,-410.43) -410.43,-433.07 cw(c-410.43,-452.75) -390.75,-452.75 -390.75,-590.55 79.72,-590.55 79.72,-476.38 cw(c103.35,-476.38) 126.97,-476.38 126.97,-590.55 390.75,-590.55 390.75,-452.75 cw(c410.43,-452.75) 410.43,-433.07 ccw(c410.43,-410.43) 433.07,-410.43 433.07,236.22 433.07,551.18 ccw(c393.7,551.18) 393.7,590.55 69,590.55